# Altium PCB 智能输液器主板.pcbdoc
Units mil, origin at the board's own origin, x right, y up, seen from the top; angles counter-clockwise.
Board outline 5676.98 x 4080 mil, 2 copper layers (Top Layer, Bottom Layer); 55 components, 48 nets, 219 pads, 286 vias.
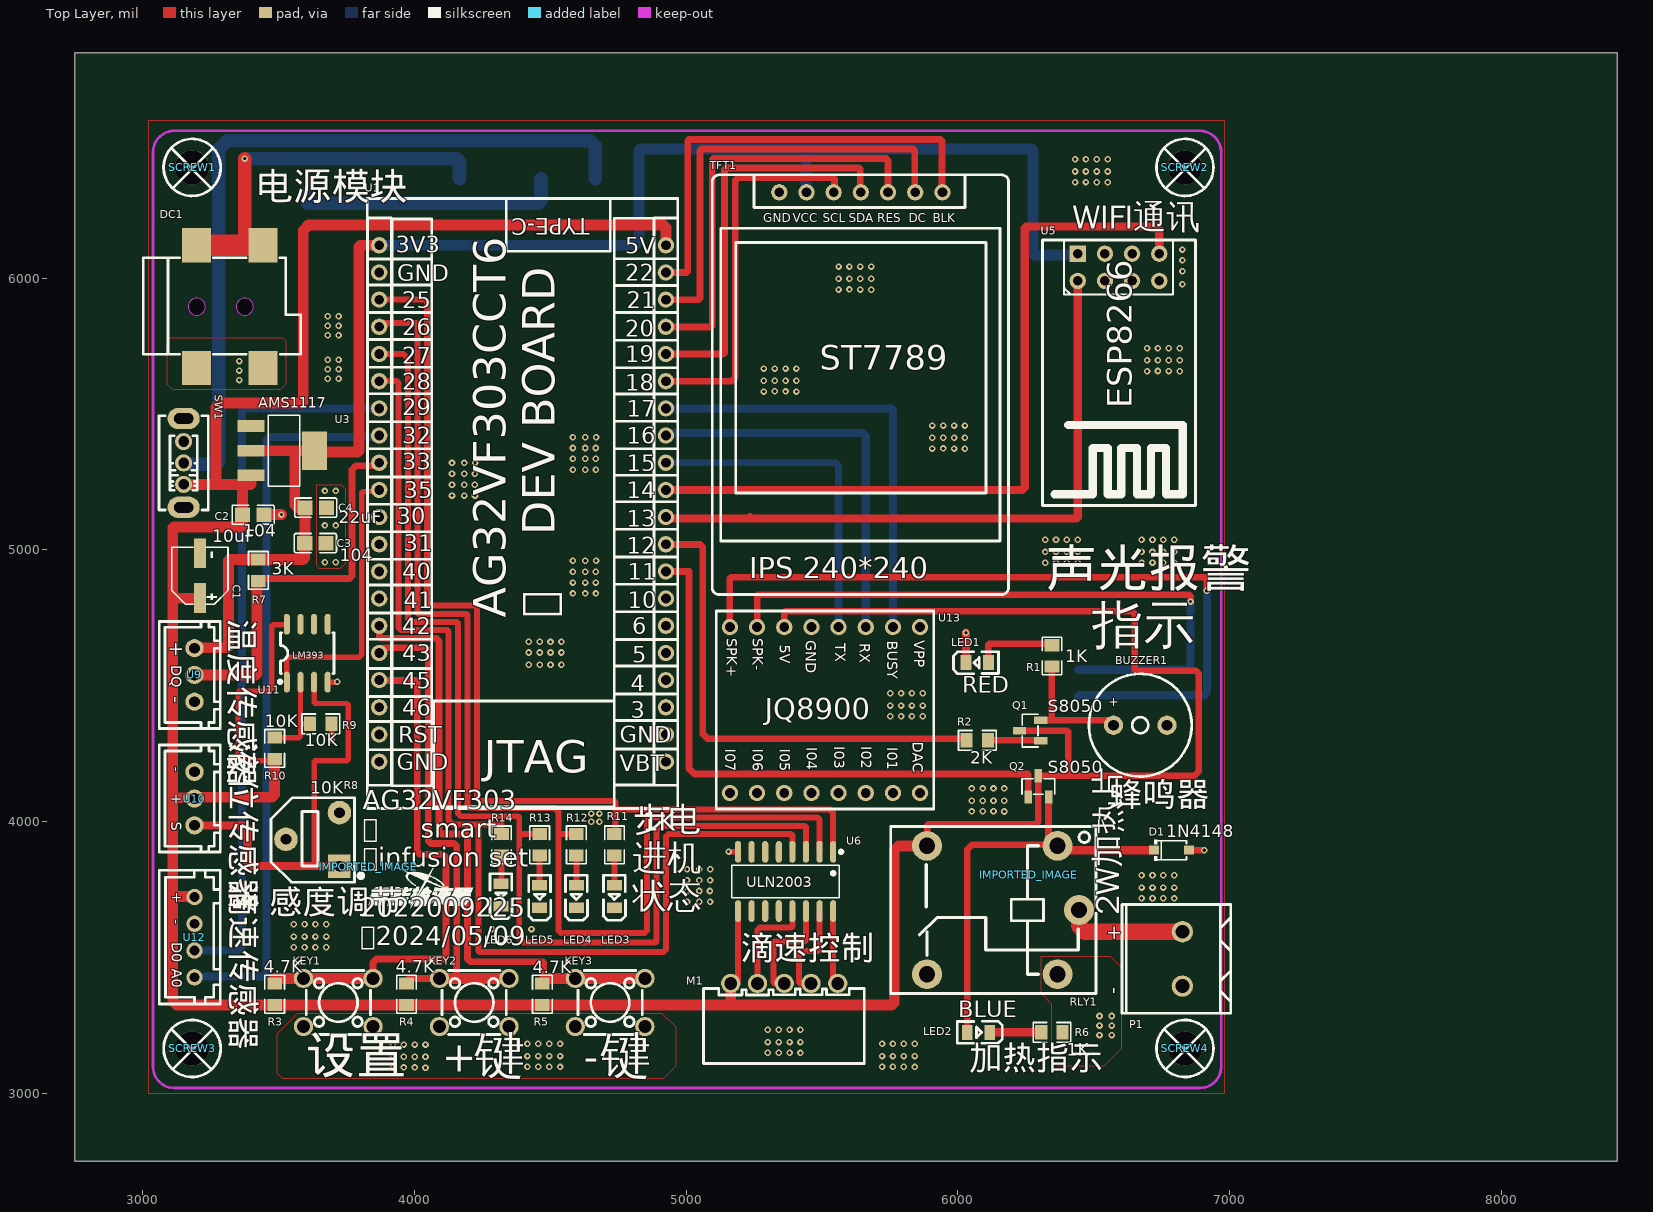
[diagram p0: Top Layer view]
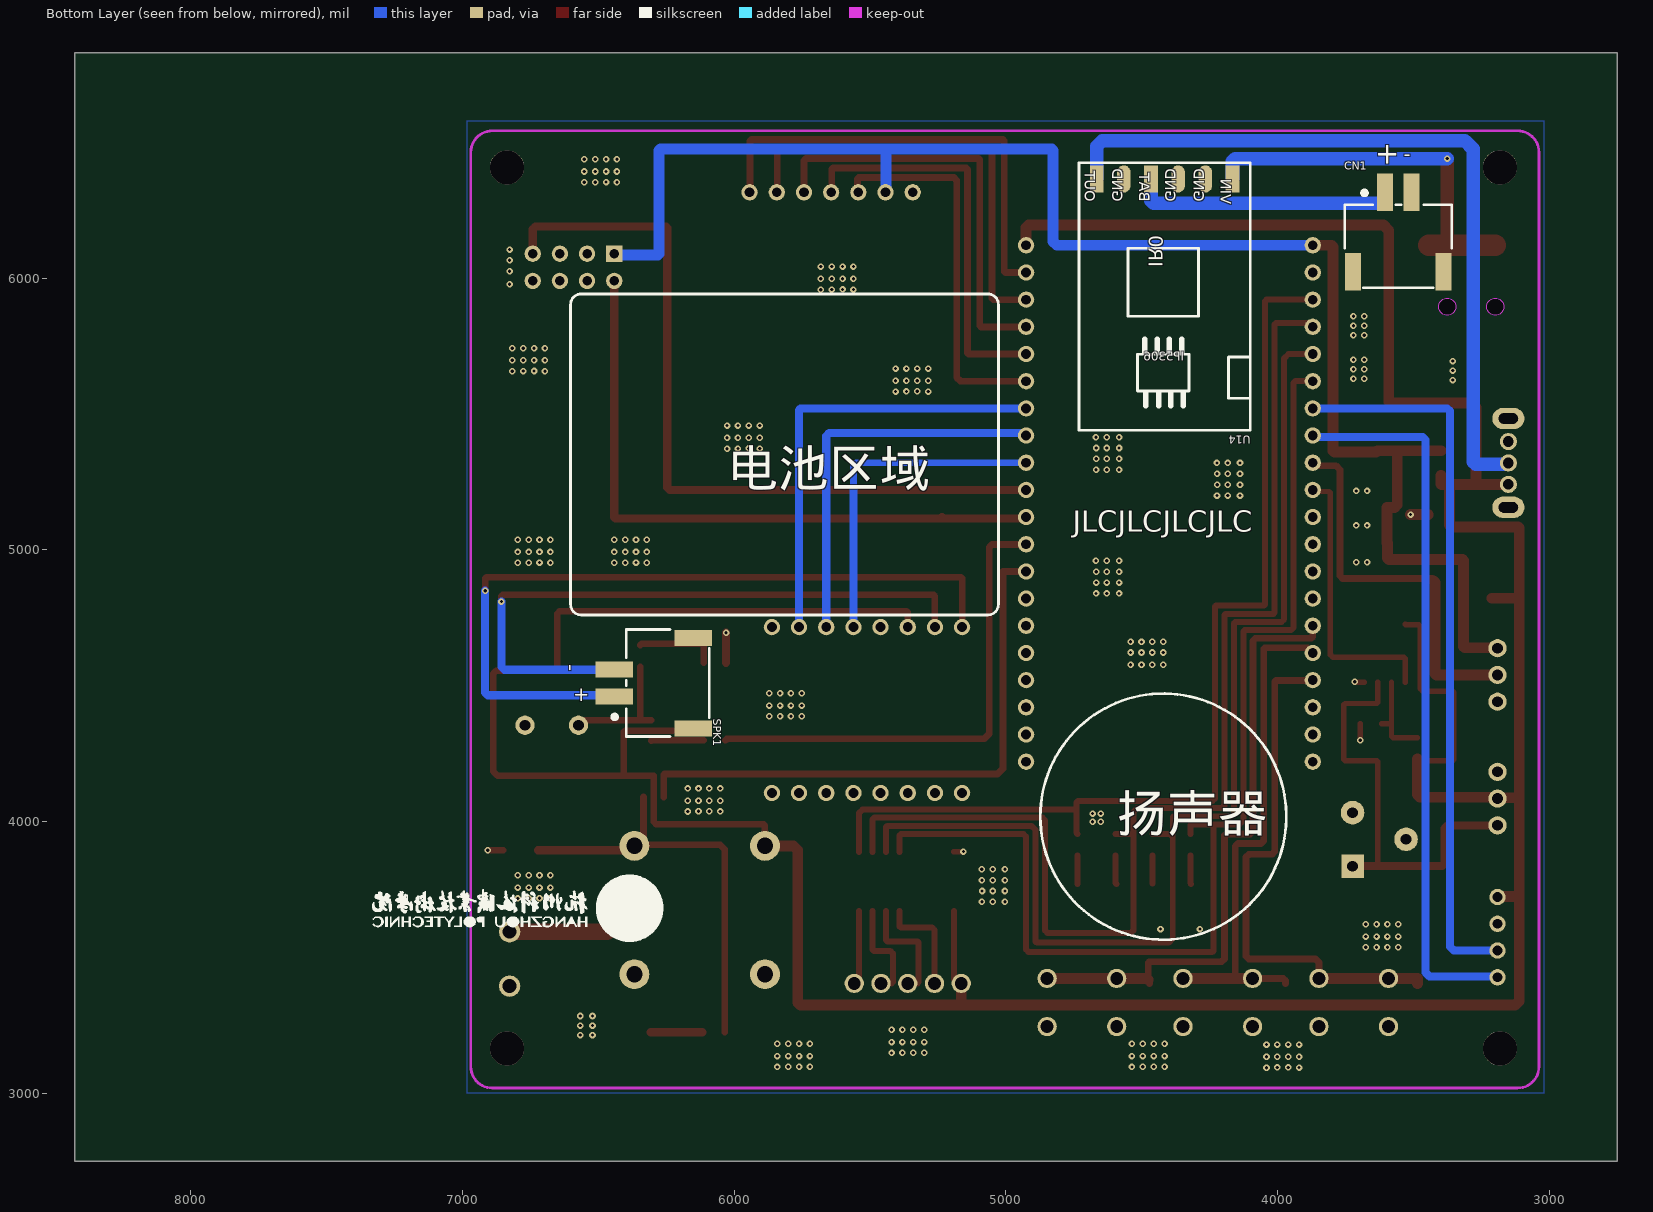
[diagram p1: Bottom Layer view, seen from below]

## Layer stack, top to bottom
Top Layer: signal copper (thickness not stored)
Dielectric: dielectric 12.6, FR-4, Dk 4.8
Bottom Layer: signal copper (thickness not stored)

## Board outline
8426.98,2750 2750,2750 2750,6830 8426.98,6830

## Components (designator, comment, footprint, x,y, rotation, side; value= is the part's Value field where it differs from the comment)
BUZZER1 "HNB09A05" BUZ-TH_BD9.6-P5.00-D0.7-FD 6671.23,4355 r0 top
C1 "RST10UF50V016" CAP-SMD_BD5.0-L5.3-W5.3-FD 3211.23,4905 r90 top
C2 "CC0805KRX7R9BB104" C0805 3406.86,5129.37 r180 top
C3 "CC0805KRX7R9BB104" C0805 3636.23,5025 r180 top
C4 "CL21A226MAQNNNE" C0805 3636.86,5155.63 r180 top
CN1 "ZX-XH2.54-2PWT" CONN-SMD_2P-P2.54_MEGASTAR_ZX-XH2.54-2PWT 3556.23,6170 r180 bottom
D1 "1N4148W_C727110" SOD-123_L3.1-W1.7-LS3.7-RD 6786.23,3895 r0 top
DC1 "DC-050-T20" DC-IN-TH_DC-050-T20 3321.23,5895 r0 top
IMPORTED_IMAGE "IMPORTED_IMAGE" IMPORTED_IMAGE 6261.23,3805 r0 top
IMPORTED_IMAGE "IMPORTED_IMAGE" IMPORTED_IMAGE 3831.23,3835 r0 top
KEY1 "TS665CJ" SW-TH_4P-L6.0-W6.0-P4.50-LS6.5 3720.43,3334.74 r0 top
KEY2 "TS665CJ" SW-TH_4P-L6.0-W6.0-P4.50-LS6.5 4220.43,3334.74 r0 top
KEY3 "TS665CJ" SW-TH_4P-L6.0-W6.0-P4.50-LS6.5 4720.43,3334.74 r0 top
LED1 "NCD0805R1" LED0805-R-RD 6071.23,4585 r0 top
LED2 "NCD0805R1" LED0805-R-RD 6076.23,3225 r180 top
LED3 "NCD0805R1" LED0805-R-RD 4736.23,3725 r90 top
LED4 "NCD0805R1" LED0805-R-RD 4596.23,3725 r90 top
LED5 "NCD0805R1" LED0805-R-RD 4461.23,3725 r90 top
LED6 "NCD0805R1" LED0805-R-RD 4318.67,3730 r90 top
M1 "步进电机" CONN-TH_XH2.54-5AW 5361.23,3405 r0 top
P1 "WJ500V-5.08-2P" CONN-TH_2P-P5.00_WJ500V-5.08-2P 6826.23,3495 r90 top
Q1 "SS8050_C7420370" SOT-23-3_L2.9-W1.3-P1.90-LS2.4-BR 6266.23,4335 r0 top
Q2 "SS8050_C7420370" SOT-23-3_L2.9-W1.3-P1.90-LS2.4-BR 6296.23,4130 r270 top
R1 "0805W8F1001T5E" R0805 6346.23,4610 r90 top
R2 "0805W8F2001T5E" R0805 6071.86,4299.37 r0 top
R3 "0805W8F4701T5E" R0805 3486.23,3365 r270 top
R4 "0805W8F4701T5E" R0805 3971.23,3365 r270 top
R5 "0805W8F4701T5E" R0805 4471.23,3365 r270 top
R6 "0805W8F1001T5E" R0805 6346.23,3225 r0 top
R7 "0805W8F4701T5E" R0805 3426.23,4925 r270 top
R8 "RM065-103(10K)" RES-ADJ-SMD_RM065-V1 3626.23,3935 r90 top
R9 "0805W8F1002T5E_C17414" R0805 3656.23,4360 r180 top
R10 "0805W8F1002T5E_C17414" R0805 3486.23,4270 r270 top
R11 "0805W8F1001T5E" R0805 4736.23,3915 r270 top
R12 "0805W8F1001T5E" R0805 4596.23,3915 r270 top
R13 "0805W8F1001T5E" R0805 4461.23,3915 r270 top
R14 "0805W8F1001T5E" R0805 4321.23,3915 r270 top
RLY1 "SRD-05VDC-SL-C" RELAY-TH_SRD-XXVDC-XL-C 6166.23,3675 r180 top
SCREW1 "M3螺丝" M3螺丝 3184.93,6405 r0 top
SCREW2 "M3螺丝" M3螺丝 6838.32,6405 r0 top
SCREW3 "M3螺丝" M3螺丝 3184.97,3163.03 r0 top
SCREW4 "M3螺丝" M3螺丝 6838.32,3163 r0 top
SPK1 "扬声器" CONN-SMD_2P-P2.54_MEGASTAR_ZX-XH2.54-2PWT 6296.23,4510 r90 bottom
SW1 "SS12D07VG4 087" SW-TH_SS12D07VG4 3151.23,5320 r90 top
TFT1 "1.3寸TFT" 1.3寸TFT 5096.23,6380 r0 top
U1 "AG32F303DEVBOARD" "AG32VF303 DEV BOARD" 3826.23,4050 r0 top
U3 "AMS1117-3.3_C6186" SOT-223-3_L6.5-W3.4-P2.30-LS7.0-BR 3516.23,5365 r180 top
U5 "WIFI模块" ESP-01S 6441.23,5990 r0 top
U6 "ULN2003_C2829422" SOP-16_L9.9-W3.9-P1.27-LS6.0-BL 5366.23,3780 r180 top
U9 "DS18B20" DS18B20 3191.23,4540 r270 top
U10 "水位传感器" 水位传感器 3191.23,4085 r270 top
U11 "LM393DR" SOIC-8_L5.0-W4.0-P1.27-LS6.0-BL 3606.23,4620 r0 top
U12 "槽型光耦" 槽型光耦 3191.23,3575 r270 top
U13 "JQ8900" JQ8900 5911.23,4775 r270 top
U14 "充放电一体5V2A" 充放电一体5v2a 4101.23,6425 r0 bottom

## Footprints (in the part's own frame and the unit in brackets; to place one, negate y for a bottom-side part, rotate by r counter-clockwise, add the part's x,y. Pads: shape width x height; smd on the part's side, far side on the other; paste and mask are expansions set on the pad)
1.3寸TFT [mil]
  round 60 hole 36: 1(246.85,-64.17) 2(346.85,-64.17) 3(446.85,-64.17) 4(546.85,-64.17) 5(646.85,-64.17) 6(746.85,-64.17) 7(846.85,-64.17)
  silkscreen extent 0,-1544 1091,0
"AG32VF303 DEV BOARD" [mil]
  round 60 hole 36: 1(44.61,2070.87) 2(44.61,1970.87) 3(44.61,1870.87) 4(44.61,1770.87) 5(44.61,1670.87) 6(44.61,1570.87) 7(44.61,1470.87) 8(44.61,1370.87) 9(44.61,1270.87) 10(44.61,1170.87) 11(44.61,1070.87) 12(44.61,970.87) 13(44.61,870.87) 14(44.61,770.87) 15(44.61,670.87) 16(44.61,570.87) 17(44.61,470.87) 18(44.61,370.87) 19(44.61,270.87) 20(44.61,170.87) 21(1099.49,170.87) 22(1099.49,270.87) 23(1099.49,370.87) 24(1099.49,470.87) 25(1099.49,570.87) 26(1099.49,670.87) 27(1099.49,770.87) 28(1099.49,870.87) 29(1099.49,970.87) 30(1099.49,1070.87) 31(1099.49,1170.87) 32(1099.49,1270.87) 33(1099.49,1370.87) 34(1099.49,1470.87) 35(1099.49,1570.87) 36(1099.49,1670.87) 37(1099.49,1770.87) 38(1099.49,1870.87) 39(1099.49,1970.87) 40(1099.49,2070.87)
  silkscreen extent 1,-1 1143,2243
BUZ-TH_BD9.6-P5.00-D0.7-FD [mm]
  round 1.8 hole 1: 1(-2.5,0) 2(2.5,0)
  silkscreen extent -4.8,-4.8 4.8,4.8
C0805 [mm]
  rect 1.41x1.35 smd: 1(-1,0) 2(1,0)
  silkscreen extent -1.96,-0.9 1.96,0.9
CAP-SMD_BD5.0-L5.3-W5.3-FD [mm]
  rect 2.8x1.1 smd: 1(-2.1,0) 2(2.1,0)
  silkscreen extent -2.66,-2.62 2.66,2.65
CONN-SMD_2P-P2.54_MEGASTAR_ZX-XH2.54-2PWT [mm]
  rect 1.5x3.5 smd: 1(-1.25,3.7) 2(1.25,3.7) 3(-4.23,-3.7) 4(4.23,-3.7)
  silkscreen extent -5,-5.21 5,3.85
CONN-TH_2P-P5.00_WJ500V-5.08-2P [mm]
  round 2 hole 1.3: 1(-2.54,0) 2(2.54,0)
  silkscreen extent -5.08,-4.52 5.08,5.64
CONN-TH_XH2.54-5AW [mm]
  round 1.8 hole 1.199 copper offset 0,0: 1(5,0) 2(2.498,0) 3(-0.001,0) 4(-2.5,0) 5(-5,0)
  silkscreen extent -7.55,-7.49 7.48,-0.48
DC-IN-TH_DC-050-T20 [mm]
  rect 2.7x3.2 smd: 3(-3.1,-5.734) 4(3.1,-5.734) 5(-3.1,5.734) 5(3.1,5.734)
  Multi-Layer board cut-out: -2.3,0 -2.411,0.396 -2.703,0.684 -3.1,0.79 -3.497,0.684 -3.789,0.396 -3.9,0 -3.9,0 -3.789,-0.396 -3.497,-0.684 -3.1,-0.79 -2.703,-0.684 -2.411,-0.396 -2.3,0
  Multi-Layer board cut-out: 2.2,0 2.09,0.396 1.797,0.684 1.4,0.79 1.003,0.684 0.711,0.396 0.6,0 0.6,0 0.711,-0.396 1.003,-0.684 1.4,-0.79 1.797,-0.684 2.09,-0.396 2.2,0
  Multi-Layer keep-out region: -2.3,0 -2.411,0.396 -2.703,0.684 -3.1,0.79 -3.497,0.684 -3.789,0.396 -3.9,0 -3.9,0 -3.789,-0.396 -3.497,-0.684 -3.1,-0.79 -2.703,-0.684 -2.411,-0.396 -2.3,0
  Multi-Layer keep-out region: 2.2,0 2.09,0.396 1.797,0.684 1.4,0.79 1.003,0.684 0.711,0.396 0.6,0 0.6,0 0.711,-0.396 1.003,-0.684 1.4,-0.79 1.797,-0.684 2.09,-0.396 2.2,0
  silkscreen extent -8.1,-4.44 6.63,4.57
DS18B20 [mm]
  round 1.7 hole 1: 1(-2.5,0) 2(0,0) 3(2.5,0)
  silkscreen extent -5,-3.3 5,2.4
ESP-01S [mil]
  rect 60x60 hole 35: 1(0,100)
  round 60 hole 35: 2(100,100) 3(200,100) 4(300,100) 5(0,0) 6(100,0) 7(200,0) 8(300,0)
  silkscreen extent -130,-826 433,150
IMPORTED_IMAGE [mil]
JQ8900 [mil]
  round 60 hole 36: 1(59.06,-50) 2(59.06,-150) 3(59.06,-250) 4(59.06,-350) 5(59.06,-450) 6(59.06,-550) 7(59.06,-650) 8(59.06,-750) 9(669.29,-750) 10(669.29,-650) 11(669.29,-550) 12(669.29,-450) 13(669.29,-350) 14(669.29,-250) 15(669.29,-150) 16(669.29,-50)
  silkscreen extent 0,-800 728,0
LED0805-R-RD [mm]
  rect 1x1.4 smd: 1(1.05,0) 2(-1.05,0)
  silkscreen extent -2.22,-1.04 1.99,1.01
M3螺丝 [mil]
  round 126 hole 126: 1(-2.5,2.5)
  silkscreen extent -107,-102 102,107
R0805 [mm]
  rect 1.133x1.377 smd: 1(-1,0) 2(1,0)
  silkscreen extent -1.76,-0.92 1.76,0.92
RELAY-TH_SRD-XXVDC-XL-C [mil]
  round 110 hole 60: 1(-200.79,-236.22) 2(279.53,-236.2) 3(279.53,236.2) 4(-200.79,236.22) 5(-279.53,0)
  silkscreen extent -342,-307 413,307
RES-ADJ-SMD_RM065-V1 [mm]
  rect 2.2x2.1 hole 1: 1(-2.5,-2.5)
  round 2.2 hole 1: 2(0,2.5) 3(2.5,-2.5)
  silkscreen extent -4,-4.7 3.9,3.9
SOD-123_L3.1-W1.7-LS3.7-RD [mm]
  rect 0.91x0.84 smd: 1(-1.63,0) 2(1.63,0)
  silkscreen extent -1.63,-0.98 1.4,0.98
SOIC-8_L5.0-W4.0-P1.27-LS6.0-BL [mil]
  oval 22.38x76.78 smd: 1(-75,-106.5) 2(-25,-106.5) 3(25,-106.5) 4(75,-106.5) 5(75,106.5) 6(25,106.5) 7(-25,106.5) 8(-75,106.5)
  silkscreen extent -106,-111 98,75
SOP-16_L9.9-W3.9-P1.27-LS6.0-BL [mil]
  oval 22.6x80.24 smd: 1(-175,-109.02) 2(-125,-109.02) 3(-75,-109.02) 4(-25,-109.02) 5(25,-109.02) 6(75,-109.02) 7(125,-109.02) 8(175,-109.02) 9(175,109.02) 10(125,109.02) 11(75,109.02) 12(25,109.02) 13(-25,109.02) 14(-75,109.02) 15(-125,109.02) 16(-175,109.02)
  silkscreen extent -210,-115 198,60
SOT-23-3_L2.9-W1.3-P1.90-LS2.4-BR [mm]
  rect 1.25x0.7 smd: 1(1,-0.95) 2(1,0.95) 3(-1,0)
  silkscreen extent -0.73,-1.53 0.73,1.53
SOT-223-3_L6.5-W3.4-P2.30-LS7.0-BR [mm]
  rect 2.5x1.1 smd: 1(2.97,-2.3) 2(2.97,0) 3(2.97,2.3)
  rect 2.34x3.6 smd: 4(-2.97,0)
  silkscreen extent -1.57,-3.33 1.37,3.33
SW-TH_4P-L6.0-W6.0-P4.50-LS6.5 [mm]
  round 1.8 hole 1.2: 1(-3.25,2.25) 2(3.25,2.25) 3(-3.25,-2.25) 4(3.25,-2.25)
  silkscreen extent -3,-3 3,3
SW-TH_SS12D07VG4 [mm]
  round 1.6 hole 1: 1(-2,0) 2(0,0) 3(2,0)
  oval 2x3 hole 1 slot 1.8 at 90 deg: 4(4.15,0) 5(-4.15,0)
  silkscreen extent -4.4,-2.3 4.4,2.3
充放电一体5v2a [mil]
  rect 50x100 smd: 1(65,60) 4(365,60) 6(565,60)
  oval 50x100 smd: 2(165,60) 3(265,60) 5(465,60)
  silkscreen extent 0,0 630,984
槽型光耦 [mil]
  round 60 hole 36: 1(-147.64,0) 2(-49.21,0.01) 3(49.21,0) 4(147.64,0.01)
  silkscreen extent -246,-130 246,94
水位传感器 [mm]
  round 1.7 hole 1: 1(-2.5,0) 2(0,0) 3(2.5,0)
  silkscreen extent -5,-3.3 5,2.4

## Via types
v1: diameter 24.02, hole 12.01, Top Layer to Bottom Layer, 286 vias

## Nets (pads, with @x,y where several pads share a name; then routed paths per layer and width w, separated by ;. In a path a pad name is that pad's centre, name@x,y a point inside that pad or via, vN(x,y) a via of type N, cw(c..) or ccw(c..) an arc to the next point about the centre after c; other vN are vias at no path point)
8266_RX: U1.30 U5.5 | length 2390
  Top Layer w30: U1.30@4931.58,5115 5241.58,5115 ; 5235.72,5120.87 5241.58,5115 ; U5.5 6441.23,5120 6436.23,5115 5241.58,5115
8266_TX: U1.31 U5.4 | length 2870.5
  Top Layer w30: U1.31 6237.1,5220.87 6246.23,5230 6246.23,6185 6251.23,6190 6731.23,6190 6741.23,6180 U5.4
$1N2864: LED1.1 R1.2 | length 303.8
  Top Layer w24: LED1.1 6112.58,4651.35 6116.23,4655 6340.6,4655 R1.2
$1N2874: BUZZER1.1 Q1.2 R1.1 | length 474.7
  Top Layer w24: Q1.2 6351.18,4372.4 ; R1.1 6346.23,4377.35 6351.18,4372.4 ; BUZZER1.1 6555.4,4372.4 6351.18,4372.4
$1N2928: Q1.1 R2.2 | length 195.1
  Top Layer w24: R2.2 6303.83,4299.37 Q1.1
$1N8956: P1.2 RLY1.5 | length 447.8
  Top Layer w60: RLY1.5 6445.76,3616.57 6467.33,3595 P1.2
$1N9207: LED2.2 R6.1 | length 189.3
  Top Layer w30: LED2.2 R6.1
$1N9226: D1.1 LED2.1 Q2.2 RLY1.1 | length 1563.8
  Top Layer w25: LED2.1 6034.88,3898.65 6051.23,3915 RLY1.1@6363.24,3915 ; Q2.2 6333.63,3944.61 RLY1.1@6363.24,3915 ; RLY1.1 RLY1.1@6363.24,3915
  Top Layer w30: RLY1.1 6383.24,3895 D1.1
$1N18974: R9.2 R10.1 U11.2 | length 333.5
  Top Layer w20: R10.1 3575.6,4309.37 3581.23,4315 3581.23,4365 ; U11.2 3581.23,4365 ; R9.2 3586.23,4360 3581.23,4365
$1N21189: SPK1.1 U13.8 | length 2838.4
  Top Layer w24: U13.8 5161.23,4895 5166.23,4900 6911.23,4900 6916.22,4895.01 v1(6916.23,4850)
  Bottom Layer w30: SPK1.1 6446.12,4465 6906.23,4465 6916.23,4475 v1(6916.23,4850)
$1N21198: SPK1.2 U13.7 | length 2392
  Top Layer w24: U13.7 5261.23,4830 5266.23,4835 6851.23,4835 6856.23,4830 v1(6856.23,4810)
  Bottom Layer w30: SPK1.2 6845.44,4559.22 6856.23,4570 v1(6856.23,4810)
$1N31746: LED3.1 R11.2 | length 104.3
  Top Layer w22: LED3.1@4736.23,3771.35 R11.2
$1N31792: LED4.1 R12.2 | length 105.3
  Top Layer w22: LED4.1@4593.71,3771.35 4596.23,3773.87 R12.2
$1N31838: LED5.1 R13.2 | length 102.7
  Top Layer w22: LED5.1@4461.23,3772.94 R13.2
$1N31884: LED6.1 R14.2 | length 105.3
  Top Layer w22: LED6.1 4321.23,3773.91 R14.2
+5V: C1.1 C2.2 M1.5 Q1.3 Q2.3 R3.2 R4.2 R5.2 R10.2 RLY1.2 SW1.1 U1.40 U3.3 U6.9 U10.2 U11.8 U12.1 U13.6 | length 14064
  Top Layer w20: R10.2 3480.6,4225 3356.23,4225 3351.23,4230 3351.23,4475 3356.23,4480 3466.23,4480 3476.23,4490 3476.23,4720 3481.23,4725 3529.73,4725 U11.8
  Top Layer w22: M1.5 5177.04,3405.01 5191.23,3419.2 U6.9
  Top Layer w24: U13.6 5361.23,4770 5366.23,4775 6641.23,4775 6651.23,4765 6651.23,4560 6656.23,4555 6876.23,4555 6886.23,4545 6886.23,4185 6870.6,4169.37 6400.6,4169.37 ; RLY1.2 5886.7,3985.47 5891.23,3990 6286.23,3990 6296.23,4000 Q2.3 6400.6,4169.37 ; Q1.3 6401.23,4335 6406.23,4330 6406.23,4175 6400.6,4169.37
  Top Layer w40: SW1.1 3270.12,5241.26 ; U12.1 3188.87,3725 3116.23,3725 3111.23,3730 ; C1.1 3111.23,4822.32 ; U3.3 3399.3,5243.07 3397.49,5241.26 3368.65,5241.26 ; R10.2 3486.23,4100 3476.23,4090 3196.23,4090 U10.2 3187.98,4088.24 3111.23,4088.24 ; U1.40 4925.72,6185.51 4916.23,6195 3611.23,6195 3591.23,6175 3591.23,5545 3586.23,5540 3286.23,5540 3270.12,5523.89 3270.12,5241.26 ; M1.5 5164.38,3338.15 5151.23,3325 ; RLY1.2 5782.43,3911.2 5766.23,3895 5766.23,3335 5756.23,3325 5151.23,3325 ; 3111.23,3730 3111.23,3340 3126.23,3325 5151.23,3325 ; 3111.23,3730 3111.23,4088.24 ; 3111.23,4088.24 3111.23,4822.32 ; 3111.23,4822.32 3111.23,5080 3116.23,5085 3361.23,5085 3367.49,5091.26 C2.2 3367.49,5240.1 3368.65,5241.26 ; 3270.12,5241.26 3368.65,5241.26
A0: U1.8 U12.4 | length 2650.2
  Bottom Layer w30: U12.4 3193.87,3430 3441.23,3430 3456.23,3445 3456.23,5405 3466.23,5415 U1.8@3869.97,5415
ALARM: R2.1 U1.29 | length 1806.9
  Top Layer w25: U1.29 4926.58,5020 5051.23,5020 5061.23,5010 5061.23,4325 5081.23,4305 6026.86,4305 R2.1
D0: U1.7 U12.3 | length 2660.5
  Bottom Layer w30: U12.3 3352.02,3525.79 3366.23,3540 3366.23,5510.87 3376.23,5520.87 U1.7
GND: BUZZER1.2 C1.2 C2.1 C3.1 C4.1 CN1.2 CN1.3 CN1.4 D1.2 DC1.3 DC1.4 KEY1.3 KEY1.4 KEY2.3 KEY2.4 KEY3.3 KEY3.4 LED1.2 LED3.2 LED4.2 LED5.2 LED6.2 P1.1 R6.2 R8.2 R8.3 R9.1 RLY1.4 SCREW1.1 SCREW2.1 SCREW3.1 SCREW4.1 TFT1.1 U1.2 U1.20 U1.22 U3.1 U5.8 U6.8 U9.3 U10.1 U11.4 U12.2 U13.5 U14.2 U14.3 U14.5 | length 362.4
  Top Layer w20: U11.4 3714.73,4513.5 v1(3716.23,4515) ; R9.1 3696.23,4359.37 v1(3696.23,4300) ; v1(5156.23,3890) 5190.25,3890 U6.8
  Top Layer w25: D1.2 v1(6906.23,3895)
  Top Layer w30: LED1.2 v1(6029.88,4695)
  Top Layer w40: C2.1 3446.86,5130 v1(3511.23,5130)
  other v1: 3921.23,3095.37 4041.23,3095.09 3961.23,3095.92 4001.23,3095.64 4416.23,3097.82 4456.23,3098.38 4496.23,3098.1 4536.23,3097.54 5721.23,3097.82 5761.23,3098.38 5801.23,3098.1 5841.23,3097.54 3921.23,3135 3961.23,3135 4001.23,3135 4041.23,3135 4416.23,3137.46 4456.23,3137.46 4496.23,3137.46 4536.23,3137.46 5721.23,3137.46 5761.23,3137.46 5801.23,3137.46 5841.23,3137.46 5300.66,3149.34 5420.66,3149.07 5340.66,3149.9 5380.66,3149.62 3921.23,3180 3961.23,3180 4001.23,3180 4041.23,3180 4416.23,3182.46 4456.23,3182.46 4496.23,3182.46 4536.23,3182.46 5721.23,3182.46 5761.23,3182.46 5801.23,3182.46 5841.23,3182.46 5300.66,3188.98 5340.66,3188.98 5380.66,3188.98 5420.66,3188.98 6521.23,3215 6566.23,3215 5300.66,3233.98 5340.66,3233.98 5380.66,3233.98 5420.66,3233.98 6521.23,3250 6566.23,3250 6521.23,3285 6566.23,3285 3556.23,3537.82 3596.23,3538.38 3636.23,3538.1 3676.23,3537.54 3556.23,3577.46 3596.23,3577.46 3636.23,3577.46 3676.23,3577.46 4286.23,3605 4431.23,3605 3556.23,3622.46 3596.23,3622.46 3636.23,3622.46 3676.23,3622.46 5003.77,3705 5048.77,3705 5088.41,3705 6676.23,3717.82 6716.23,3718.38 6756.23,3718.1 6796.23,3717.54 5003.77,3745 5048.77,3745 5087.85,3745 6676.23,3757.46 6716.23,3757.46 6756.23,3757.46 6796.23,3757.46 5003.77,3785 5048.77,3785 5088.13,3785 6676.23,3802.46 6716.23,3802.46 6756.23,3802.46 6796.23,3802.46 5003.77,3825 5048.77,3825 5088.69,3825 4651.23,4000 4681.23,4000 4651.23,4030 4681.23,4030 6051.23,4037.82 6091.23,4038.38 6131.23,4038.1 6171.23,4037.54 6051.23,4077.46 6091.23,4077.46 6131.23,4077.46 6171.23,4077.46 6051.23,4122.46 6091.23,4122.46 6131.23,4122.46 6171.23,4122.46 5751.23,4387.82 5791.23,4388.38 5831.23,4388.1 5871.23,4387.54 5751.23,4427.46 5791.23,4427.46 5831.23,4427.46 5871.23,4427.46 5751.23,4472.46 5791.23,4472.46 5831.23,4472.46 5871.23,4472.46 4421.23,4577.54 4461.23,4577.54 4501.23,4577.54 4541.23,4577.54 4421.23,4622.54 4461.23,4622.54 4501.23,4622.54 4541.23,4622.54 4421.23,4662.46 4461.23,4661.9 4501.23,4661.62 4541.23,4662.18 4583.77,4840 4628.77,4840 4668.41,4840 4583.77,4880 4628.77,4880 4667.85,4880 4583.77,4920 4628.77,4920 4668.13,4920 6321.23,4952.82 6361.23,4953.38 6401.23,4953.1 6441.23,4952.54 6676.23,4952.82 6716.23,4953.38 6756.23,4953.1 6796.23,4952.54 3671.23,4955 3711.23,4955 4583.77,4960 4628.77,4960 4668.69,4960 6321.23,4992.46 6361.23,4992.46 6401.23,4992.46 6441.23,4992.46 6676.23,4992.46 6716.23,4992.46 6756.23,4992.46 6796.23,4992.46 6321.23,5037.46 6361.23,5037.46 6401.23,5037.46 6441.23,5037.46 6676.23,5037.46 6716.23,5037.46 6756.23,5037.46 6796.23,5037.46 3671.23,5090 3711.23,5090 4138.77,5200 4183.77,5200 4223.41,5200 3671.23,5216.98 3711.23,5216.98 4138.77,5240 4183.77,5240 4222.85,5240 4138.77,5280 4183.77,5280 4223.13,5280 4583.77,5295 4628.77,5295 4668.41,5295 4138.77,5320 4183.77,5320 4223.69,5320 4583.77,5335 4628.77,5335 4667.85,5335 5906.23,5372.82 5946.23,5373.38 5986.23,5373.1 6026.23,5372.54 4583.77,5375 4628.77,5375 4668.13,5375 5906.23,5412.46 5946.23,5412.46 5986.23,5412.46 6026.23,5412.46 4583.77,5415 4628.77,5415 4668.69,5415 5906.23,5457.46 5946.23,5457.46 5986.23,5457.46 6026.23,5457.46 5286.23,5582.82 5326.23,5583.38 5366.23,5583.1 5406.23,5582.54 5286.23,5622.46 5326.23,5622.46 5366.23,5622.46 5406.23,5622.46 3356.23,5625 3681.23,5630 3721.23,5630 6696.23,5657.82 6736.23,5658.38 6776.23,5658.1 6816.23,5657.54 3356.23,5660 3681.23,5665 3721.23,5665 5286.23,5667.46 5326.23,5667.46 5366.23,5667.46 5406.23,5667.46 3356.23,5695 6696.23,5697.46 6736.23,5697.46 6776.23,5697.46 6816.23,5697.46 3681.23,5700 3721.23,5700 6696.23,5742.46 6736.23,5742.46 6776.23,5742.46 6816.23,5742.46 3681.23,5790 3721.23,5790 3681.23,5825 3721.23,5825 3681.23,5860 3721.23,5860 5561.23,5957.82 5601.23,5958.38 5641.23,5958.1 5681.23,5957.54 6826.23,5977.94 5561.23,5997.46 5601.23,5997.46 5641.23,5997.46 5681.23,5997.46 6826.23,6025 5561.23,6042.46 5601.23,6042.46 5641.23,6042.46 5681.23,6042.46 6826.23,6065.53 6826.23,6105 6431.23,6352.82 6471.23,6353.38 6511.23,6353.1 6551.23,6352.54 6431.23,6392.46 6471.23,6392.46 6511.23,6392.46 6551.23,6392.46 6431.23,6437.46 6471.23,6437.46 6511.23,6437.46 6551.23,6437.46
IN1: R11.1 U1.3 U6.1 | length 3769.4
  Top Layer w22: U1.3 4040.36,5920.87 4046.23,5915 4046.23,4800 4051.23,4795 4227.14,4795 4231.23,4790.91 4231.23,4085 4240.23,4076 4735.23,4076 4741.23,4070 4741.23,4045 ; R11.1 4741.23,3959.37 4741.23,4045 ; U6.1 5541.23,4031.29 5527.52,4045 4741.23,4045
IN2: R12.1 U1.4 U6.2 | length 4443.9
  Top Layer w22: U1.4 3884.97,5835 4006.23,5835 4011.23,5830 4011.23,4770 4016.23,4765 4191.23,4765 4196.23,4760 4196.23,4060 4206.23,4050 4516.23,4050 4531.23,4035 4531.23,3950 ; R12.1 4535.6,3954.37 4531.23,3950 ; U6.2 5491.23,4008 5484.23,4015 4866.23,4015 4856.23,4005 4856.23,3600 4846.23,3590 4541.23,3590 4531.23,3600 4531.23,3950
IN3: R13.1 U1.5 U6.3 | length 4292.1
  Top Layer w22: U1.5 3960.36,5720.87 3976.23,5705 3976.23,4745 3986.23,4735 4156.23,4735 4161.23,4730 4161.23,4030 4171.23,4020 4383.35,4020 4386.23,4017.12 4386.23,3945 ; R13.1 4395.6,3954.37 4386.23,3945 ; U6.3 5441.23,3980 5436.23,3985 4906.23,3985 4891.23,3970 4891.23,3560 4886.23,3555 4401.23,3555 4386.23,3570 4386.23,3945
IN4: R14.1 U1.6 U6.4 | length 4203.4
  Top Layer w22: U1.6 3935.36,5620.87 3941.23,5615 3941.23,4715 3951.23,4705 4121.23,4705 4126.23,4700 4126.23,4005 4141.23,3990 4236.23,3990 ; R14.1 4321.23,3990 4236.23,3990 ; U6.4 5391.23,3949.37 5386.23,3954.37 4935.6,3954.37 4926.23,3945 4926.23,3530 4916.23,3520 4241.23,3520 4236.23,3525 4236.23,3990
JQ_BUSY: U1.34 U13.2 | length 1621
  Bottom Layer w30: U1.34@4940.84,5520 5755.36,5520 5761.23,5514.13 U13.2
JQ_RX: U1.33 U13.3 | length 1428.1
  Bottom Layer w30: U1.33@4940.84,5430 5650.36,5430 5661.23,5419.13 U13.3
JQ_TX: U1.32 U13.4 | length 1234.1
  Bottom Layer w25: U1.32 5550.36,5320.87 5561.23,5310 5561.23,5229.13
  Bottom Layer w30: U13.4 5561.23,5229.13
K1: KEY1.1 KEY1.2 R3.1 U1.17 | length 1963.4
  Top Layer w25: KEY1.2 3848.38,3482.15 3861.23,3495 4106.23,3495 4116.23,3505 4116.23,3870 4106.23,3880 4021.23,3880 4011.23,3890 4011.23,4515 4006.23,4520 3871.7,4520 U1.17
  Top Layer w40: R3.1 3486.23,3423.32 KEY1.1 KEY1.2
K2: KEY2.1 KEY2.2 R4.1 U1.16 | length 1886.5
  Top Layer w25: U1.16 3889.97,4640 4046.23,4640 4051.23,4635 4051.23,3930 4061.23,3920 4146.23,3920 4156.23,3910 4156.23,3423.39 ; R4.1 3971.23,3415 3979.55,3423.32 KEY2.1
  Top Layer w40: KEY2.1 KEY2.2
K3: KEY3.1 KEY3.2 R5.1 U1.15 | length 2271.6
  Top Layer w25: U1.15 3870.84,4680.39 3876.23,4675 4081.23,4675 4091.23,4665 4091.23,3965 4101.23,3955 4191.23,3955 4196.23,3950 4196.23,3495 4206.23,3485 4471.23,3485 4476.23,3480 4476.23,3418.32 4476.23,3409.37 R5.1
  Top Layer w40: R5.1@4476.23,3418.32 4481.23,3423.32 KEY3.1 KEY3.2
O1: M1.1 U6.16 | length 272.9
  Top Layer w22: U6.16 5541.23,3421.86 M1.1
O2: M1.2 U6.15 | length 372.6
  Top Layer w22: M1.2 5421.22,3405.01 5416.23,3410 5416.23,3515 5426.23,3525 5486.23,3525 5491.23,3530 U6.15
O3: M1.3 U6.14 | length 417.1
  Top Layer w22: M1.3 5326.22,3405.01 5321.23,3410 5321.23,3555 5326.23,3560 5436.23,3560 5441.23,3565 U6.14
O4: M1.4 U6.13 | length 410.8
  Top Layer w22: M1.4@5287.03,3405.01 M1.4 5262.78,3601.55 5271.23,3610 5386.23,3610 5391.23,3615 U6.13
RELAY: Q2.1 U1.28 | length 2149.6
  Top Layer w25: U1.28 5010.36,4920.87 5011.23,4920 5011.23,4195 5031.23,4175 6256.23,4175 6258.83,4172.4 Q2.1
TEMP: R7.2 U1.9 U9.2 | length 1419.2
  Top Layer w25: R7.2@3431.23,4895 3761.23,4895 3771.23,4905 3771.23,5295 3786.23,5310 3859.97,5310 U1.9
  Top Layer w40: U9.2 3416.22,4539.99 3421.23,4545 3421.23,4880.63 R7.2
TFT_BLK: TFT1.7 U1.39 | length 1691.3
  Top Layer w25: U1.39 5002.1,6020.87 5006.23,6025 5006.23,6505 5011.23,6510 5936.23,6510 5941.23,6505 5941.23,6317.68 TFT1.7
TFT_DC: TFT1.6 U1.38 | length 1620.8
  Top Layer w25: U1.38 5046.23,5920.87 5051.23,5925.87 5051.23,6470 5056.23,6475 5836.23,6475 5841.23,6470 5841.23,6317.68 TFT1.6
TFT_MOSI: TFT1.4 U1.36 | length 1481.3
  Top Layer w25: U1.36 5137.1,5720.87 5141.23,5725 5141.23,6400 5146.23,6405 5636.23,6405 5641.23,6400 5641.23,6317.68 TFT1.4
TFT_RES: TFT1.5 U1.37 | length 1551.4
  Top Layer w25: U1.37 4926.58,5820 5091.23,5820 5096.23,5825 5096.23,6435 5101.23,6440 5735.23,6440 5743.08,6432.15 TFT1.5
TFT_SCK: TFT1.3 U1.35 | length 1408.1
  Top Layer w25: U1.35 5167.1,5620.87 5181.23,5635 5181.23,6360 5191.23,6370 5541.23,6370 5546.23,6365 5546.23,6318.98 TFT1.3
VBAT: CN1.1 U14.4 | length 985.6
  Bottom Layer w50: CN1.1 3605.44,6275 4456.23,6275 4466.23,6285 U14.4
VCC: C3.2 C4.2 R7.1 TFT1.2 U1.1 U3.2 U3.4 U5.1 U9.1 | length 5841.3
  Top Layer w40: U9.1 3192.8,4640 3311.23,4640 3316.23,4645 3316.23,4960 3320.6,4964.37 R7.1 3590.6,4964.37 3596.23,4970 3596.23,5024.37 C3.2 3597.49,5025.63 C4.2 3570.6,5155.63 3559.94,5166.29 3559.94,5365 ; U3.2 3559.94,5365 ; U1.1 3802.1,6120.87 3796.23,6115 3796.23,5365 3791.23,5360 3638.16,5360 U3.4 3559.94,5365
  Bottom Layer w40: U1.1 4812.1,6120.87 4826.23,6135 4826.23,6470 4831.23,6475 5436.23,6475 ; TFT1.2 5441.23,6317.68 5441.23,6470 5436.23,6475 ; U5.1@6441.23,6085 6281.23,6085 6276.23,6090 6276.23,6470 6271.23,6475 5436.23,6475
VIN: DC1.5 U14.1 | length 1422.5
  Top Layer w50: 3376.23,6120.75 v1(3376.23,6440)
  Top Layer w80: DC1.5@3199.18,6120.75 3376.23,6120.75 DC1.5@3443.28,6120.75
  Bottom Layer w50: v1(3376.23,6440) 4156.23,6440 4166.23,6430 U14.1
VOUT: SW1.2 U14.6 | length 2812.3
  Bottom Layer w50: SW1.2 3156.23,5315 3271.43,5315 3281.23,5324.8 3281.23,6475.2 3311.24,6505.21 4646.02,6505.21 4666.23,6485 U14.6
WOUT: U1.10 U11.1 | length 1031.8
  Top Layer w20: U11.1 3531.23,4600 3536.23,4605 3796.23,4605 3806.23,4615 3806.23,5210 3811.23,5215 3864.97,5215 U1.10
WS: R8.1 U10.3 U11.3 | length 1590.3
  Top Layer w20: U11.3 3631.23,4440 3636.23,4435 3751.23,4435 3756.23,4430 3756.23,4230 3751.23,4225 3636.23,4225 3631.23,4220 3631.23,3845 3639.65,3836.57
  Top Layer w30: U10.3 3374.65,3986.57 3386.23,3975 3386.23,3845.12 3394.78,3836.57 3639.65,3836.57 R8.1
"": RLY1.3 SPK1.3 SPK1.4 SW1.3 SW1.4 SW1.5 U1.11 U1.12 U1.13 U1.14 U1.18 U1.19 U1.21 U1.23 U1.24 U1.25 U1.26 U1.27 U5.2 U5.3 U5.6 U5.7 U6.5 U6.6 U6.7 U6.10 U6.11 U6.12 U11.5 U11.6 U11.7 U13.1 U13.9 U13.10 U13.11 U13.12 U13.13 U13.14 U13.15 U13.16

## Polygon pours and split planes (outlines as drawn)
GND on Bottom Layer (solid, remove dead copper, pour order 4): 3021.23,3000 6981.23,3000 6981.23,6580 3021.23,6580
GND on Top Layer (solid, remove dead copper, pour order 5): 3021.23,3000 6981.23,3000 6981.23,6580 3021.23,6580
GND on Top Layer (solid, remove dead copper, pour order 0): 3093.44,5780 3516.23,5780 3526.23,5770 3526.23,5610 3506.23,5590 3111.23,5590 3091.23,5610 3091.23,5735.59
GND on Top Layer (solid, remove dead copper, pour order 1): 3496.23,3220 3571.23,3295 4911.23,3295 4961.23,3245 4961.23,3100 4916.23,3055 3516.23,3055 3496.23,3075
GND on Top Layer (solid, remove dead copper, pour order 2): 6307,3505 6561.23,3505 6601.23,3465 6601.23,3165 6536.23,3100 6366.23,3100 6346.23,3120 6346.23,3328.68 6307,3367.91
GND on Top Layer (solid, remove dead copper, pour order 3): 3641.23,5240 3731.23,5240 3746.23,5225 3746.23,4950 3726.23,4930 3650.25,4930 3641.23,4944.86

## Keep-outs
Board Outline Layer:
  lines w10 net "": 3038.6,3098.74 ccw(c3117.34,3098.74) 3117.34,3020 6890.12,3020 ccw(c6890.12,3098.74) 6968.86,3098.74 6968.86,6463.27 ccw(c6890.12,6463.27) 6890.12,6542.01 3117.34,6542.01 ccw(c3117.34,6463.27) 3038.6,6463.27 3038.6,3098.74

## Silkscreen, mask and mechanical layers (free items; w line width, h text height)
Top Silkscreen Layer:
  text "电源模块" at 3416.6,6288.81 h101.95
  text "WIFI通讯" at 6422.01,6181.72 h90.62
  text "ST7789" at 5491.34,5662.59 h90.62
  text "AMS1117" at 3426.06,5523.32 h38.94
  text "ESP8266" at 6639.51,5521.01 h90.62 r90
  text "22uF" at 3721.39,5098.36 h45.31
  text "104" at 3371.28,5048.36 h45.31
  text "10uF" at 3256.39,5028.36 h45.31
  text "104" at 3726.28,4958.36 h45.31
  text "3K" at 3476.17,4908.36 h45.31
  text "温度传感器" at 3322.95,4744.44 h90.62 r270
  text "声光报警 /     指示" at 6323.81,4658.33 h138.39
  text "LM393" at 3551.73,4598.88 h25.96
  text "1K" at 6395.2,4586.48 h45.31
  text "RED" at 6016.23,4475 h60
  text "S8050" at 6331.51,4403.36 h45.31
  text "10K" at 3450.17,4347.7 h45.31
  text "液位传感器" at 3327.95,4289.44 h90.62 r270
  text "10K" at 3596.28,4278.36 h45.31
  text "2K" at 6046.17,4213.36 h45.31
  text "S8050" at 6331.51,4178.36 h45.31
  text "10K" at 3616.28,4103.36 h45.31
  text "蜂鸣器" at 6556.33,4056.72 h90.62
  text "1K" at 4841.14,3967.54 h67.97
  text "1N4148" at 6766.62,3943.36 h45.31
  text "AG32VF303 /       smart /  infusion set" at 3811.23,3835 h70
  text "滴速传感器" at 3327.95,3774.45 h90.62 r270
  text "ULN2003" at 5221.06,3758.32 h38.94
  text "步电 /  进机 /  状态" at 4804.58,3683.9 h93.19
  text "感度调节" at 3466.56,3661.72 h90.62
  text "2W加热片" at 6594.51,3655.55 h90.62 r90
  text "+" at 6546.23,3567.57 h52.3
  text "2022009225 /  2024/05/09" at 3801.23,3545 h70
  text "滴速控制" at 5201.56,3491.72 h90.62
  text "4.7K" at 3446.39,3443.36 h45.31
  text "4.7K" at 3931.39,3443.36 h45.31
  text "4.7K" at 4435.29,3442.7 h45.31
  text "-" at 6593.66,3365 h52.3 r90
  text "BLUE" at 6001.23,3280 h60
  text "1K" at 6401.17,3138.36 h45.31
  text "加热指示" at 6041.56,3086.72 h90.62
  text "设置" at 3601.05,3075.08 h135.94
  text "+键" at 4111.05,3075.08 h135.94
  text "-键" at 4631.05,3075.08 h135.94
Bottom Silkscreen Layer:
  circle w10 net "": c4420.9,4018.63 r452.76
  lines w10 net "": 5027.37,4800.12 ccw(c5066.74,4800.12) 5066.74,4760.75 6562.8,4760.75 ccw(c6562.8,4800.12) 6602.17,4800.12 6602.17,5902.48 ccw(c6562.8,5902.48) 6562.8,5941.85 5066.74,5941.85 ccw(c5066.74,5902.48) 5027.37,5902.48 5027.37,4800.12
  text "-" at 3536.23,6432.57 h52.3
  text "+" at 3641.23,6421.36 h78.45
  text "电池区域" at 6021.72,5235.08 h135.94
  text "JLCJLCJLCJLC" at 4753.8,5066.64 h77.88
  text "-" at 6623.8,4580 h52.3 r90
  text "+" at 6591.23,4442.57 h52.3
  text "扬声器" at 4591.38,3965.08 h135.94

## Text inside footprints (layer, text, board x,y; h text height)
BUZZER1: Top Silkscreen Layer "+" at 6555.88,4425.39 h32.69
TFT1: Top Silkscreen Layer "IPS 240*240" at 5232.22,4896.64 h77.88; Top Silkscreen Layer "GND" at 5283.46,6206.1 h32.45; Top Silkscreen Layer "VCC" at 5393.46,6206.1 h32.45; Top Silkscreen Layer "SCL" at 5503.46,6206.1 h32.45; Top Silkscreen Layer "BLK" at 5908.46,6206.1 h32.45; Top Silkscreen Layer "DC" at 5819.88,6206.1 h32.45; Top Silkscreen Layer "RES" at 5703.46,6206.1 h32.45; Top Silkscreen Layer "SDA" at 5598.46,6206.1 h32.45
U1: Top Silkscreen Layer "3V3" at 3932.41,6092.91 h60; Top Silkscreen Layer "GND" at 3937.41,5987.91 h60; Top Silkscreen Layer "25" at 3956.23,5890 h60; Top Silkscreen Layer "26" at 3956.23,5790 h60; Top Silkscreen Layer "27" at 3956.23,5685 h60; Top Silkscreen Layer "28" at 3956.23,5590 h60; Top Silkscreen Layer "29" at 3956.23,5495 h60; Top Silkscreen Layer "32" at 3956.23,5390 h60; Top Silkscreen Layer "33" at 3956.23,5295 h60; Top Silkscreen Layer "35" at 3961.23,5190 h60; Top Silkscreen Layer "30" at 3936.23,5095 h60; Top Silkscreen Layer "31" at 3961.23,4995 h60; Top Silkscreen Layer "40" at 3956.23,4890 h60; Top Silkscreen Layer "41" at 3961.23,4785 h60; Top Silkscreen Layer "42" at 3956.23,4690 h60; Top Silkscreen Layer "43" at 3956.23,4590 h60; Top Silkscreen Layer "45" at 3956.23,4490 h60; Top Silkscreen Layer "46" at 3956.23,4390 h60; Top Silkscreen Layer "RST" at 3941.23,4290 h60; Top Silkscreen Layer "GND" at 3936.23,4190 h60; Top Silkscreen Layer "5V" at 4776.23,6090 h60; Top Silkscreen Layer "GND" at 4756.23,4290 h60; Top Silkscreen Layer "VBT" at 4756.23,4185 h60; Top Silkscreen Layer "3" at 4796.23,4380 h60; Top Silkscreen Layer "4" at 4796.23,4480 h60; Top Silkscreen Layer "5" at 4801.23,4585 h60; Top Silkscreen Layer "6" at 4801.23,4690 h60; Top Silkscreen Layer "10" at 4786.23,4785 h60; Top Silkscreen Layer "11" at 4786.23,4890 h60; Top Silkscreen Layer "12" at 4781.23,4985 h60; Top Silkscreen Layer "13" at 4781.23,5085 h60; Top Silkscreen Layer "14" at 4781.23,5190 h60; Top Silkscreen Layer "15" at 4781.23,5290 h60; Top Silkscreen Layer "16" at 4781.23,5390 h60; Top Silkscreen Layer "17" at 4781.23,5490 h60; Top Silkscreen Layer "18" at 4776.23,5585 h60; Top Silkscreen Layer "19" at 4776.23,5690 h60; Top Silkscreen Layer "20" at 4776.23,5785 h60; Top Silkscreen Layer "21" at 4781.23,5890 h60; Top Silkscreen Layer "22" at 4776.23,5990 h60; Top Silkscreen Layer "JTAG" at 4256.23,4180 h120; Top Silkscreen Layer "TYPE-C" at 4644.77,6220 h60 r180; Top Silkscreen Layer "AG32VF303CCT6 /      DEV BOARD" at 4516.23,4750 h120 r90
U9: Top Silkscreen Layer "+" at 3100.53,4664.02 h52.3 r270; Top Silkscreen Layer "-" at 3100.53,4461.47 h52.3 r270; Top Silkscreen Layer "DQ" at 3105.34,4575.67 h38.94 r270
U10: Top Silkscreen Layer "-" at 3107.56,4202.52 h39.22 r270; Top Silkscreen Layer "+" at 3108.34,4105.47 h39.22 r270; Top Silkscreen Layer "S" at 3105.79,3998.98 h39.22 r270
U12: Top Silkscreen Layer "+" at 3109.13,3742.32 h39.22 r270; Top Silkscreen Layer "-" at 3108.34,3641.93 h39.22 r270; Top Silkscreen Layer "D0" at 3106.91,3556.14 h38.94 r270; Top Silkscreen Layer "A0" at 3106.91,3459.69 h38.94 r270
U13: Top Silkscreen Layer "DAC" at 5834.55,4293.32 h38.94 r270; Top Silkscreen Layer "I01" at 5739.55,4273.32 h38.94 r270; Top Silkscreen Layer "I02" at 5644.55,4278.32 h38.94 r270; Top Silkscreen Layer "I03" at 5544.55,4278.32 h38.94 r270; Top Silkscreen Layer "I04" at 5444.55,4273.32 h38.94 r270; Top Silkscreen Layer "I05" at 5344.55,4268.32 h38.94 r270; Top Silkscreen Layer "I06" at 5244.55,4268.32 h38.94 r270; Top Silkscreen Layer "I07" at 5144.55,4268.32 h38.94 r270; Top Silkscreen Layer "SPK+" at 5149.55,4675.03 h38.94 r270; Top Silkscreen Layer "SPK-" at 5244.55,4675.03 h38.94 r270; Top Silkscreen Layer "5V" at 5344.55,4651.61 h38.94 r270; Top Silkscreen Layer "GND" at 5439.55,4668.32 h38.94 r270; Top Silkscreen Layer "TX" at 5549.55,4656.61 h38.94 r270; Top Silkscreen Layer "RX" at 5639.55,4656.61 h38.94 r270; Top Silkscreen Layer "VPP" at 5839.55,4668.32 h38.94 r270; Top Silkscreen Layer "BUSY" at 5739.55,4665.03 h38.94 r270
U14: Bottom Silkscreen Layer "VIN" at 4209.55,6271.68 h38.94 r90; Bottom Silkscreen Layer "GND" at 4309.55,6281.68 h38.94 r90; Bottom Silkscreen Layer "GND" at 4414.55,6281.68 h38.94 r90; Bottom Silkscreen Layer "BAT" at 4509.55,6281.68 h38.94 r90; Bottom Silkscreen Layer "OUT" at 4709.55,6281.68 h38.94 r90; Bottom Silkscreen Layer "GND" at 4609.55,6281.68 h38.94 r90; Bottom Silkscreen Layer "IR0" at 4473.99,6040.57 h51.92 r90; Bottom Silkscreen Layer "IP5306" at 4343.27,5696.1 h32.45